# EAGLE board logger (EAGLE 6.4)
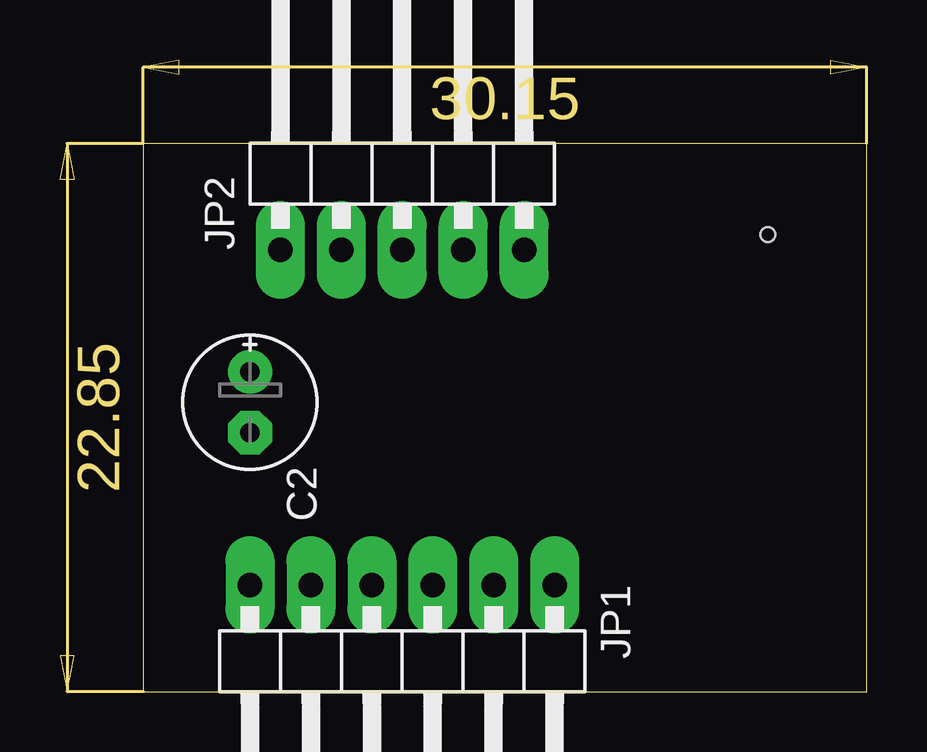
[diagram p0: board, top side]
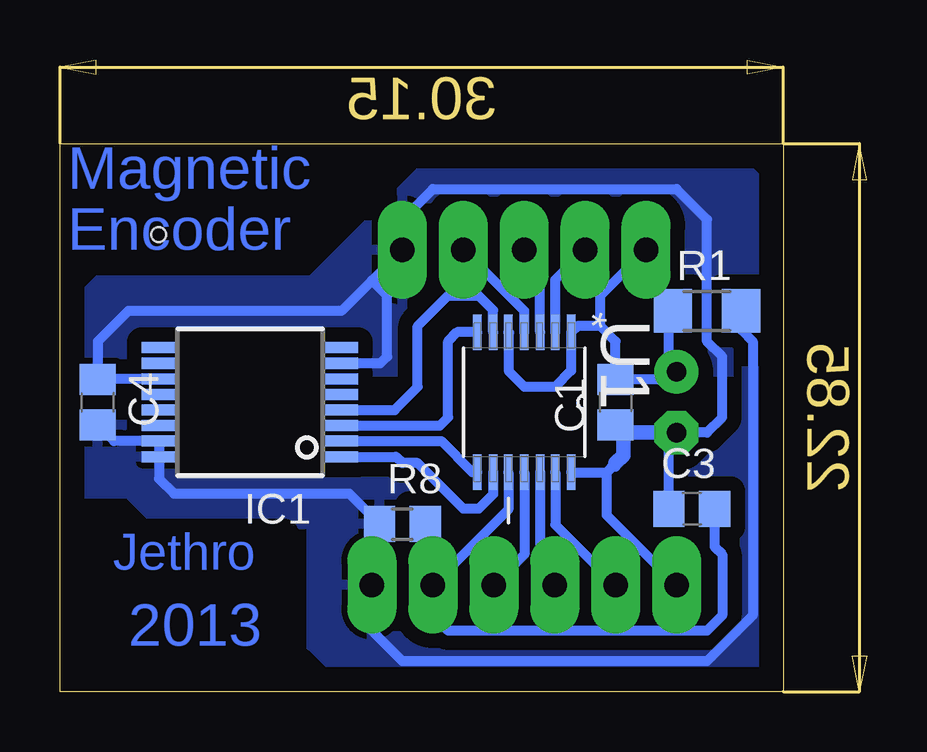
[diagram p1: board, bottom side, seen from below]

Size 30.15 x 22.85 mm. Coordinates in mm from the lower left corner, seen from the top.
Outline: 0,0 30.15,0 30.15,22.85 0,22.85 0,0
Copper layers (1*16): Top 0.035mm / dielectric 1.5mm / Bottom 0.035mm
Design rules "default *": minimum track width 10mil, minimum drill 24mil, track to track 8mil, track to pad 8mil, pad to pad 8mil, via to via 8mil, smd to smd 8mil, copper to edge 40mil, drill to drill 8mil, minimum pad ring 20mil, minimum via ring 15mil, stop-mask expansion 4mil, vias tented up to drill 0mil, thermal gap 10mil
Holes 0.6 mm at 26.03,19.05
bRestrict: area 8.3,10.2 to 13.3,14; area 19.7,9.5 to 24.8,14.6

## Footprints (pad centres in the part's own frame; a part is rotated, then mirrored left to right if it is on the bottom)
C0805 = smd 1.3 x 1.5: 1 -0.95,0; 2 0.95,0
E2,5-6E = drill 0.813 pad 1.575: + -1.27,0 | drill 0.813 pad 1.575 octagon: - 1.27,0
SSOP16 = smd 0.46 x 1.43: 1 -2.275,-3.795; 2 -1.625,-3.795; 3 -0.975,-3.795; 4 -0.325,-3.795; 5 0.325,-3.795; 6 0.975,-3.795; 7 1.625,-3.795; 8 2.275,-3.795; 9 2.275,3.795; 10 1.625,3.795; 11 0.975,3.795; 12 0.325,3.795; 13 -0.325,3.795; 14 -0.975,3.795; 15 -1.625,3.795; 16 -2.275,3.795
1X06/90 = drill 1.016 long: 1 -6.35,-3.81; 2 -3.81,-3.81; 3 -1.27,-3.81; 4 1.27,-3.81; 5 3.81,-3.81; 6 6.35,-3.81
1X05/90 = drill 1.016 long: 1 -5.08,-3.81; 2 -2.54,-3.81; 3 0,-3.81; 4 2.54,-3.81; 5 5.08,-3.81
R1206 = smd 1.6 x 1.803: 1 -1.422,0; 2 1.422,0
R0805 = smd 1.3 x 1.5: 1 -0.95,0; 2 0.95,0
SOP65P640X120-14N = smd 1.473 x 0.356: 1 -2.921,1.956; 2 -2.921,1.295; 3 -2.921,0.66; 4 -2.921,0; 5 -2.921,-0.66; 6 -2.921,-1.295; 7 -2.921,-1.956; 8 2.921,-1.956; 9 2.921,-1.295; 10 2.921,-0.66; 11 2.921,0; 12 2.921,0.66; 13 2.921,1.295; 14 2.921,1.956

## Placement (x,y rotation side)
C1  [C0805]  6.98,12.06 90 bottom
C2  [E2,5-6E]  4.45,12.06 270 top
C3  [C0805]  3.81,7.62 0 bottom
C4  [C0805]  28.58,12.06 270 bottom
IC1  AS5040  [SSOP16]  22.23,12.06 90 bottom
JP1  [1X06/90]  10.8,0.64 180 top
JP2  [1X05/90]  10.8,22.23 0 top
R1  [R1206]  3.18,15.88 0 bottom
R8  [R0805]  15.88,6.98 0 bottom
U1  MSP430G2352IPW14  [SOP65P640X120-14N]  10.8,12.06 270 bottom

## Library data of the parts
C1-C4 R1 R8 = rcl
IC1 = austriamicrosystems; MPN: AS5040ASSU; OC_FARNELL: 1630800; OC_NEWARK: 59P4059
JP1 JP2 = pinhead
U1 = MSP430G2352IPW14; MPN: MSP430G2352IPW14; OC_FARNELL: 1866895; OC_NEWARK: 24T4701; PACKAGE: TSSOP-14; SUPPLIER: Texas Instruments

## Nets
+3V3: C1.2 C2.+ JP2.1 R1.1 U1.1 U1.5
GND: C1.1 C2.- C3.1 C4.1 IC1.7 IC1.11 JP1.6 JP2.5 U1.14
N$1: JP1.3 U1.11
N$2: JP2.3 U1.3
N$3: JP1.4 U1.12
N$4: IC1.4 U1.6
N$5: IC1.3 U1.7
N$6: C4.2 IC1.15 IC1.16 JP1.1 R1.2 R8.1
N$7: JP1.5 U1.13
N$10: IC1.2 U1.8
N$11: IC1.1 U1.9
N$13: JP2.2 U1.2
N$15: C3.2 JP1.2 R8.2 U1.10
N$17: JP2.4 U1.4

## Tracks (layer width: path | path; a pad name or v marks a point on that pad's centre or on a via)
+3V3
  Bottom 0.406: 4.77,13.02 C2.+ | 4.77,13.02 C1.2 6.98,14.61 7.62,15.24 | U1.5 11.43,14.96 11.43,13.34 10.8,12.7 9.53,12.7 8.84,13.39 U1.1 8.59,15.24 7.62,15.24 | 7.62,15.24 7.62,16.51 JP2.1 | 4.77,13.02 4.77,15.71 R1.1
GND
  Bottom 0.406: U1.14 7.37,9.14 | 7.37,9.14 6.98,9.52 6.98,9.38 | 6.67,10.8 C1.1 | IC1.7 16.79,13.69 16.51,13.97 16.51,16.51 17.15,17.14 | IC1.11 28.55,13.04 C4.1 28.58,14.61 27.31,15.88 18.42,15.88 17.15,17.14 | 7.37,9.14 7.37,7.37 JP1.6 | C3.1 4.76,10.48 C2.- 3.18,10.8 2.54,11.43 2.54,13.97 3.18,14.61 3.18,19.69 4.45,20.95 14.61,20.95 15.88,19.69 JP2.5 17.15,17.14
  Bottom 0.61: C2.- 6.67,10.8 6.67,9.84 6.98,9.52
  pour Bottom (isolate 0.61): 1.91,22.23 14.61,22.23 19.69,17.14 28.58,17.14 31.12,14.61 31.12,13.34 -0.63,13.34 -0.63,19.69
N$1
  Bottom 0.406: U1.11 10.8,5.72 JP1.3
N$2
  Bottom 0.406: U1.3 10.14,17.75 JP2.3
N$3
  Bottom 0.406: U1.12 10.14,5.05 JP1.4
N$4
  Bottom 0.406: IC1.4 16.2,11.74 15.24,12.7 15.24,15.24 13.97,16.51 12.7,16.51 12.09,15.9 U1.6
N$5
  Bottom 0.406: IC1.3 14.31,11.09 13.97,11.43 13.97,14.61 13.59,14.99 U1.7
N$6
  Bottom 0.406: JP1.1 17.15,4.12 | C4.2 27.9,10.44 IC1.15 IC1.16 26.02,8.88 25.4,8.26 18.09,8.26 R8.1 17.15,6.66 JP1.1 | R1.2 1.75,15.09 1.27,14.61 1.27,3.18 3.18,1.27 15.88,1.27 17.15,2.54 JP1.1
  pour Bottom (isolate 0.61): -0.63,13.34 31.12,13.34 31.12,9.52 29.84,8.26 27.31,8.26 26.03,6.98 19.69,6.98 19.69,1.91 18.42,0.64 0.64,0.64 -0.63,1.91
N$7
  Bottom 0.406: U1.13 9.5,6.96 JP1.5
N$10
  Bottom 0.406: IC1.2 14.25,10.44 12.95,9.14 U1.8
N$11
  Bottom 0.406: IC1.1 16.14,9.79 15.88,9.52 15.24,9.52 13.34,7.62 12.7,7.62 12.09,8.23 U1.9
N$13
  Bottom 0.406: U1.2 9.5,17.17 JP2.2
N$15
  Bottom 0.406: U1.10 11.45,7.59 JP1.2 | JP1.2 14.61,6.66 R8.2 | C3.2 2.86,6.04 2.54,5.72 2.54,3.18 3.18,2.54 13.97,2.54 14.61,3.18 JP1.2
N$17
  Bottom 0.406: U1.4 10.8,15.88 JP2.4

## Text on the board
Bottom: Magnetic | Encoder | Jethro | 2013